# EAGLE board PC temperature Monitor (EAGLE 7.6.0)

Size 73.58 x 63.39 mm. Coordinates in mm from the lower left corner, seen from the top.
Outline: 0,0 56.82,0 56.82,53.33 0,53.33 0,0
Copper layers (1*16): Top 0.035mm / dielectric 1.5mm / Bottom 0.035mm
Design rules "default": minimum track width 10mil, minimum drill 24mil, track to track 8mil, track to pad 8mil, pad to pad 8mil, via to via 8mil, smd to smd 8mil, copper to edge 40mil, drill to drill 8mil, minimum pad ring 10mil, minimum via ring 8mil, stop-mask expansion 4mil, vias tented up to drill 0mil, thermal gap 10mil

## Footprints (pad centres in the part's own frame; a part is rotated, then mirrored left to right if it is on the bottom)
2P-2.54-65/35MIL = drill 0.889 pad 1.651 square: 1 0,1.27 | drill 0.889 pad 1.651: 2 0,-1.27
TO220 = drill 1.118 long: 1 -2.54,-6.35; 2 0,-6.35; 3 2.54,-6.35 | hole 3.302: 0,11.176
0207/10 = drill 0.813 octagon: 1 -5.08,0; 2 5.08,0
B25V = drill 0.813 long: A 2.54,0.635; E -2.54,0.635; S 0,0.635
ARDUINO_UNO = drill 1.016 pad 1.88: 0 63.5,50.8; 1 60.96,50.8; 2 58.42,50.8; 3 55.88,50.8; 3.3V 35.56,2.54; 4 53.34,50.8; 5 50.8,50.8; 5V 38.1,2.54; 6 48.26,50.8; 7 45.72,50.8; 8 41.656,50.8; 9 39.116,50.8; 10 36.576,50.8; 11 34.036,50.8; 12 31.496,50.8; 13 28.956,50.8; A0 50.8,2.54; A1 53.34,2.54; A2 55.88,2.54; A3 58.42,2.54; A4 60.96,2.54; A5 63.5,2.54; AREF 23.876,50.8; GND 26.416,50.8; GND. 43.18,2.54; GND.. 40.64,2.54; I/OREF 30.48,2.54; N/C 27.94,2.54; RESET 33.02,2.54; SCL 18.796,50.8; SDA 21.336,50.8; VIN 45.72,2.54 | hole 3.2: 66.04,7.62; 66.04,35.56; 15.24,50.8; 13.97,2.54
TO92 = drill 0.813 octagon: 1 1.27,0; 2 0,1.905; 3 -1.27,0
1X16P-2.54-2.54-11.6-3.0-BLACK-MALE = drill 0.889 pad 1.651 square: 1 0,19.05 | drill 0.889 pad 1.651: 2 0,16.51; 3 0,13.97; 4 0,11.43; 5 0,8.89; 6 0,6.35; 7 0,3.81; 8 0,1.27; 9 0,-1.27; 10 0,-3.81; 11 0,-6.35; 12 0,-8.89; 13 0,-11.43; 14 0,-13.97; 15 0,-16.51; 16 0,-19.05

## Placement (x,y rotation side)
MDC Motor- 12v  [2P-2.54-65/35MIL]  5,111.68 0 top  (outside the outline)
Ppower supply  12V  [2P-2.54-65/35MIL]  5,124.38 0 top  (outside the outline)
QTIP120  [TO220]  5,86.28 0 top  (outside the outline)
Resister  2.2k‎Ω  [0207/10]  5,98.98 0 top  (outside the outline)
Resistor  220‎Ω  [0207/10]  5,48.18 0 top
Rpot-Touch sensor  nullk‎Ω  [B25V]  5,73.58 0 top  (outside the outline)
Rpotentiometer  10k‎Ω  [B25V]  5,35.48 0 top
U-Arduino Uno R3  [ARDUINO_UNO]  5,10.08 0 top
U-DTH11/TMP36  [TO92]  5,60.88 0 top
U-LCD 16X2 display  [1X16P-2.54-2.54-11.6-3.0-BLACK-MALE]  5,22.78 0 top

## Library data of the parts
MDC Motor- 12v Ppower supply QTIP120 Resister Resistor Rpot-Touch sensor Rpotentiometer U-Arduino Uno R3 U-DTH11/TMP36 U-LCD 16X2 display = AUTODESK_CIRCUITS_BREADBOARD

## Nets
N$1: Rpotentiometer.S U-LCD 16X2 display.3
N$2: U-Arduino Uno R3.12 U-LCD 16X2 display.4
N$3: U-Arduino Uno R3.11 U-LCD 16X2 display.6
N$4: U-LCD 16X2 display.9
N$5: U-LCD 16X2 display.10
N$6: U-Arduino Uno R3.5 U-LCD 16X2 display.11
N$7: U-Arduino Uno R3.4 U-LCD 16X2 display.12
N$8: U-Arduino Uno R3.3 U-LCD 16X2 display.13
N$9: Resistor.1 U-LCD 16X2 display.15
N$10: U-LCD 16X2 display.7
N$11: U-LCD 16X2 display.8
N$12: U-Arduino Uno R3.2 U-LCD 16X2 display.14
N$13: Resistor.2 Rpot-Touch sensor.S Rpotentiometer.E U-Arduino Uno R3.5V U-DTH11/TMP36.3 U-LCD 16X2 display.2
N$14: U-Arduino Uno R3.6 U-DTH11/TMP36.2
N$15: Rpot-Touch sensor.A U-Arduino Uno R3.10
N$16: Resister.1 U-Arduino Uno R3.8
N$17: MDC Motor- 12v.2 Ppower supply.2
N$18: MDC Motor- 12v.1 QTIP120.2
N$19: Ppower supply.1 QTIP120.3 Rpot-Touch sensor.E Rpotentiometer.A U-Arduino Uno R3.GND.. U-DTH11/TMP36.1 U-LCD 16X2 display.1 U-LCD 16X2 display.5 U-LCD 16X2 display.16
N$20: QTIP120.1 Resister.2

## Tracks (layer width: path | path; a pad name or v marks a point on that pad's centre or on a via)
N$1  (1 unrouted)
N$2  (1 unrouted)
N$3  (1 unrouted)
N$6  (1 unrouted)
N$7  (1 unrouted)
N$8  (1 unrouted)
N$9  (1 unrouted)
N$12  (1 unrouted)
N$13  (5 unrouted)
N$14  (1 unrouted)
N$15  (1 unrouted)
N$16  (1 unrouted)
N$17  (1 unrouted)
N$18  (1 unrouted)
N$19  (8 unrouted)
N$20  (1 unrouted)